# EAGLE board FLYTE-v2 - Copy (EAGLE 9.6.2)
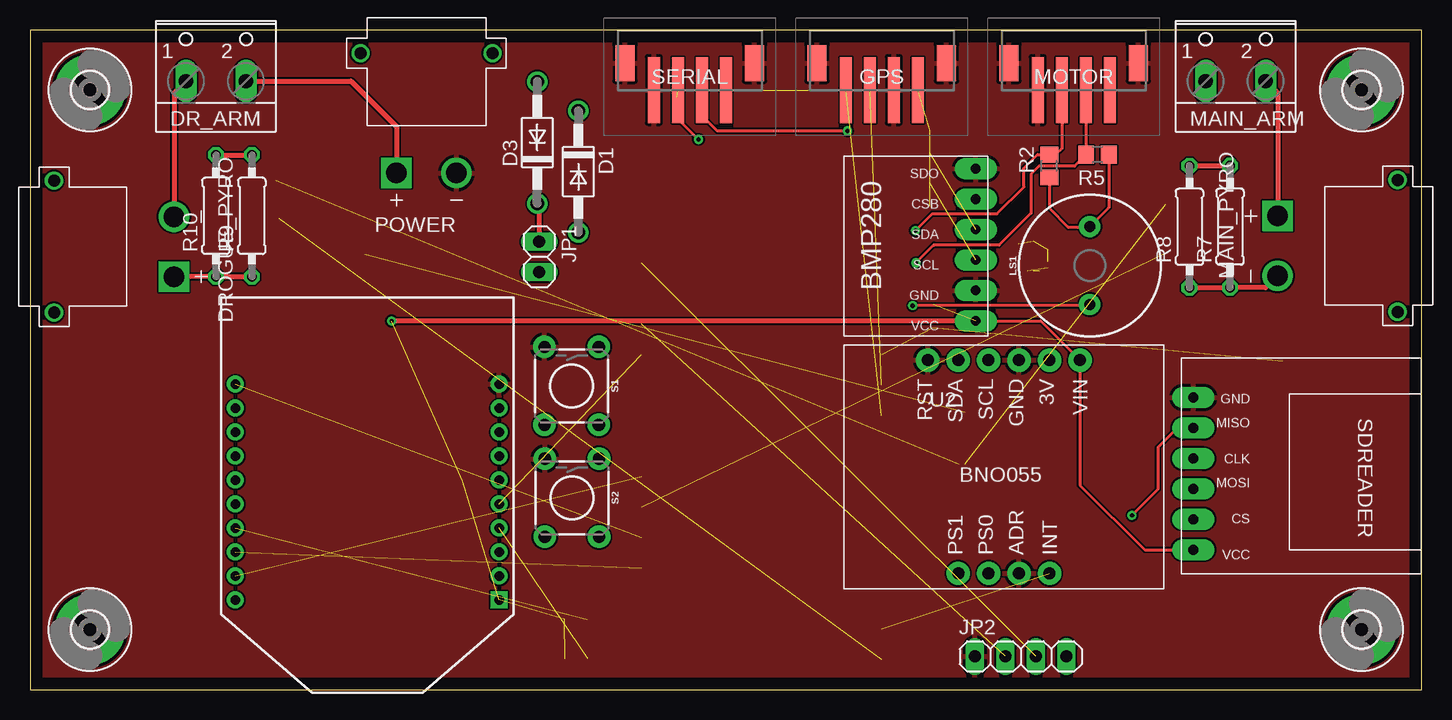
[diagram p0: board, top side]
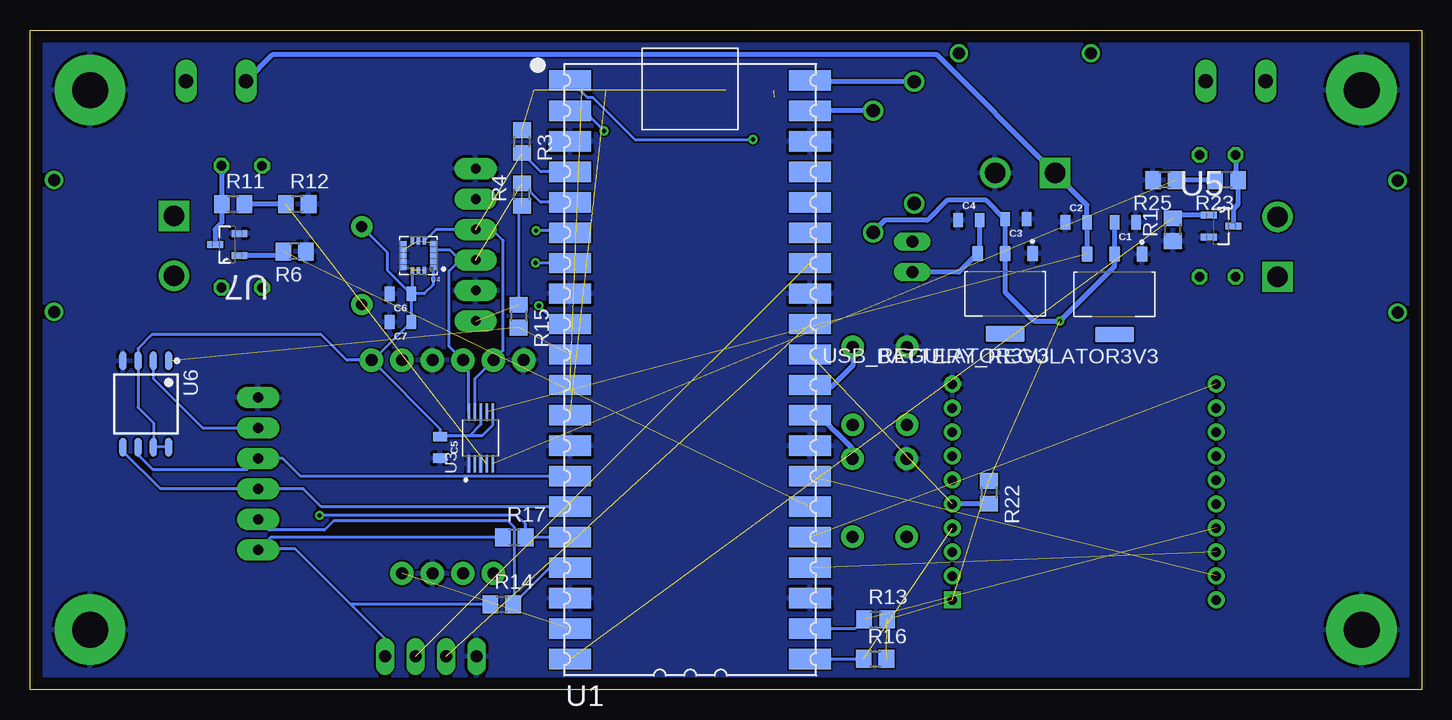
[diagram p1: board, bottom side, seen from below]

Size 116 x 55 mm. Coordinates in mm from the lower left corner, seen from the top.
Outline: 0,0 116,0 116,55 0,55 0,0
Copper layers (1*16): Top 0.035mm / dielectric 1.5mm / Bottom 0.035mm
Design rules "default": minimum track width 6mil, minimum drill 0.35mm, track to track 6mil, track to pad 6mil, pad to pad 6mil, via to via 6mil, smd to smd 6mil, copper to edge 40mil, drill to drill 6mil, minimum pad ring 10mil, minimum via ring 8mil, stop-mask expansion 4mil, vias tented up to drill 0mil, thermal gap 10mil

## Footprints (pad centres in the part's own frame; a part is rotated, then mirrored left to right if it is on the bottom)
SOT229P700X180-4N = smd 0.93 x 1.31: 1 -2.29,-3.345; 2 0,-3.345; 3 2.29,-3.345 | smd 3.24 x 1.31: 4 0,3.345
0805 = smd 0.8 x 1.2: 1 -0.9,0; 2 0.9,0
DO41-10 = drill 1.118: A 5.08,0; C -5.08,0
W237-102 = drill 1.194 long: 1 -2.5,-1.27; 2 2.5,-1.27
AMASS_XT30PW-M = drill 1.7: N 2.5,-10 | drill 1.7 square: P -2.5,-10 | drill 1: S1 5.5,0; S2 -5.5,0
4392 = smd 1 x 5.5: 1 3,3.5; 2 1,3.5; 3 -1,3.5; 4 -3,3.5 | smd 1.6 x 3: MP1 5.4,1.25; MP2 -5.4,1.25
3,0-PAD = drill 3 pad 5.842: B3,0 0,0
1X02 = drill 1.016 long: 1 -1.27,0; 2 1.27,0
1X04 = drill 1.016 long: 1 -3.81,0; 2 -1.27,0; 3 1.27,0; 4 3.81,0
BUZZER-12MM = drill 0.9 pad 1.778: + 3.25,0; - -3.25,0
R0805 = smd 1.3 x 1.5: 1 -0.95,0; 2 0.95,0
0207/10 = drill 0.813 octagon: 1 -5.08,0; 2 5.08,0
TACTILE_SWITCH_PTH_6.0MM = drill 1.016 pad 1.88: 1 -3.251,2.261; 2 3.251,2.261; 3 -3.251,-2.261; 4 3.251,-2.261
PICO-PKG-NO_DEBUG = smd 3.5 x 1.7: P$1 -8.73,25.4; P$2 -8.73,22.86; P$3 -8.73,20.32; P$4 -8.73,17.78; P$5 -8.73,15.24; P$6 -8.73,12.7; P$7 -8.73,10.16; P$8 -8.73,7.62; P$9 -8.73,5.08; P$10 -8.73,2.54; P$11 -8.73,0; P$12 -8.73,-2.54; P$13 -8.73,-5.08; P$14 -8.73,-7.62; P$15 -8.73,-10.16; P$16 -8.73,-12.7; P$17 -8.73,-15.24; P$18 -8.73,-17.78; P$19 -8.73,-20.32; P$20 -8.73,-22.86; P$21 11.27,-22.86; P$22 11.27,-20.32; P$23 11.27,-17.78; P$24 11.27,-15.24; P$25 11.27,-12.7; P$26 11.27,-10.16; P$27 11.27,-7.62; P$28 11.27,-5.08; P$29 11.27,-2.54; P$30 11.27,0; P$31 11.27,2.54; P$32 11.27,5.08; P$33 11.27,7.62; P$34 11.27,10.16; P$35 11.27,12.7; P$36 11.27,15.24; P$37 11.27,17.78; P$38 11.27,20.32; P$39 11.27,22.86; P$40 11.27,25.4
DIP2200W51P200L3294H279Q20P = drill 0.8 pad 1.4 square: 1 -11,8.75 | drill 0.8 pad 1.4: 2 -11,6.75; 3 -11,4.75; 4 -11,2.75; 5 -11,0.75; 6 -11,-1.25; 7 -11,-3.25; 8 -11,-5.25; 9 -11,-7.25; 10 -11,-9.25; 11 11,-9.25; 12 11,-7.25; 13 11,-5.25; 14 11,-3.25; 15 11,-1.25; 16 11,0.75; 17 11,2.75; 18 11,4.75; 19 11,6.75; 20 11,8.75
SOP50P490X110-10N = smd 1.47 x 0.28: 1 -2.15,1; 2 -2.15,0.5; 3 -2.15,0; 4 -2.15,-0.5; 5 -2.15,-1; 6 2.15,-1; 7 2.15,-0.5; 8 2.15,0; 9 2.15,0.5; 10 2.15,1
PQFN50P300X300X100-16N = smd 0.53 x 0.35: 1 -1.22,1; 2 -1.22,0.5; 3 -1.22,0; 4 -1.22,-0.5; 5 -1.22,-1; 9 1.22,-1; 10 1.22,-0.5; 11 1.22,0; 12 1.22,0.5; 13 1.22,1 | smd 0.35 x 0.53: 6 -0.5,-1.22; 7 0,-1.22; 8 0.5,-1.22; 14 0.5,1.22; 15 0,1.22; 16 -0.5,1.22
SOT91P240X120-3N = smd 1.321 x 0.559: 1 -1.016,0.914; 2 -1.016,-0.914; 3 1.016,0
SOIC127P790X216-8N = smd 1.6 x 0.6: 1 -3.6,1.905; 2 -3.6,0.635; 3 -3.6,-0.635; 4 -3.6,-1.905; 5 3.6,-1.905; 6 3.6,-0.635; 7 3.6,0.635; 8 3.6,1.905
BMP280 = drill 0.8 pad 1.778 long: CSB 11.43,1; GND 3.81,1; SCL 6.35,1; SDA 8.89,1; SDO 13.97,1; VCC 1.27,1
SDREADER = drill 0.8 pad 1.778 long: CLK 1,9.62; CS 1,4.54; GND 1,14.7; MISO 1,12.16; MOSI 1,7.08; VCC 1,2
BNO055 = drill 1 pad 1.93: 3V 9.525,1.27; ADR 12.065,19.05; GND 12.065,1.27; INT 9.525,19.05; PS0 14.605,19.05; PS1 17.145,19.05; RST 19.685,1.27; SCL 14.605,1.27; SDA 17.145,1.27; VIN 6.985,1.27

## Placement (x,y rotation side)
BATTERY_REGULATOR3V3  AMS1117-3.3  [SOT229P700X180-4N]  25.6,32.95 180 bottom
C1  22uF  [0805]  24.7,38.95 180 bottom
C2  22uF  [0805]  28.79,38.97 0 bottom
C3  22uF  [0805]  33.82,39.23 180 bottom
C4  22uF  [0805]  37.74,39.15 0 bottom
C5  0.1uF  [0805]  81.81,20.19 270 bottom
C6  10 uF  [0805]  85.12,33 180 bottom
C7  100 nF  [0805]  85.12,30.65 180 bottom
D1  1N4004  [DO41-10]  45.71,43.19 270 top
D3  1N4004  [DO41-10]  42.29,45.61 90 top
DR_ARM  [W237-102]  15.5,52 0 top
DROGUE_PYRO  XT30PW-M  [AMASS_XT30PW-M]  2,36.93 90 top
GPS  4392  [4392]  71,53.5 180 top
H1  MOUNT-PAD-ROUND3.0  [3,0-PAD]  5,5 0 top
H2  MOUNT-PAD-ROUND3.0  [3,0-PAD]  5,50 0 top
H3  MOUNT-PAD-ROUND3.0  [3,0-PAD]  111,5 0 top
H4  MOUNT-PAD-ROUND3.0  [3,0-PAD]  111,50 0 top
JP1  [1X02]  42.45,36.08 270 top
JP2  [1X04]  82.59,2.76 0 top
LS1  BUZZER-PTH  [BUZZER-12MM]  88.35,35.35 90 top
MAIN_ARM  [W237-102]  100.5,52 0 top
MAIN_PYRO  XT30PW-M  [AMASS_XT30PW-M]  114,37 270 top
MOTOR  4392  [4392]  87,53.5 180 top
POWER  XT30PW-M  [AMASS_XT30PW-M]  33.05,53.07 0 top
R1  4.7K  [R0805]  20.72,38.35 90 bottom
R2  4.7K ohm  [R0805]  84.96,43.65 90 top
R3  4.7K ohm  [R0805]  75,45.69 270 bottom
R4  4.7K ohm  [R0805]  75,41.27 90 bottom
R5  4.7K ohm  [R0805]  88.99,44.6 180 top
R6  4.7K  [R0805]  93.94,36.54 180 bottom
R7  10 ohm  [0207/10]  100.04,38.6 90 top
R8  10 ohm  [0207/10]  96.66,38.59 90 top
R9  10 ohm  [0207/10]  18.5,39.5 90 top
R10  10 ohm  [0207/10]  15.5,39.5 90 top
R11  100K ohm  [R0805]  99.06,40.5 0 bottom
R12  100K ohm  [R0805]  93.72,40.5 0 bottom
R13  4.7K ohm  [R0805]  45.5,5.84 0 bottom
R14  4.7K ohm  [R0805]  76.68,7.11 0 bottom
R15  4.7K ohm  [R0805]  75.28,31.14 270 bottom
R16  100K ohm  [R0805]  45.55,2.56 0 bottom
R17  100K ohm  [R0805]  75.63,12.71 0 bottom
R22  4.7K ohm  [R0805]  36.06,16.44 270 bottom
R23  100K ohm  [R0805]  16.25,42.5 180 bottom
R25  100K ohm  [R0805]  21.43,42.5 180 bottom
S1  MOMENTARY-SWITCH-SPST-PTH-6.0MM  [TACTILE_SWITCH_PTH_6.0MM]  45.15,25.32 270 top
S2  MOMENTARY-SWITCH-SPST-PTH-6.0MM  [TACTILE_SWITCH_PTH_6.0MM]  45.18,15.99 270 top
SERIAL  4392  [4392]  55,53.5 180 top
U1  [PICO-PKG-NO_DEBUG]  62.23,25.4 0 bottom
U2  XBP9B-XCST-021  [DIP2200W51P200L3294H279Q20P]  28.11,16.22 180 top
U3  ADS1115IDGSR  [SOP50P490X110-10N]  78.42,20.98 90 bottom
U4  H3LIS200DLTR  [PQFN50P300X300X100-16N]  83.63,36.17 180 bottom
U5  BS170F  [SOT91P240X120-3N]  16.71,38.65 0 bottom
U6  W25Q32JVSSIQ  [SOIC127P790X216-8N]  106.35,23.81 270 bottom
U7  BS170F  [SOT91P240X120-3N]  99.56,37.1 180 bottom
U$1  BMP280  [BMP280]  79.85,29.47 90 top
U$3  SDREADER  [SDREADER]  95.98,9.65 0 top
U$4  BNO055  [BNO055]  94.52,28.73 180 top
USB_REGULATOR3V3  AMS1117-3.3  [SOT229P700X180-4N]  34.72,33 180 bottom

## Library data of the parts
BATTERY_REGULATOR3V3 USB_REGULATOR3V3 = AMS1117-3.3; AVAILABILITY: Not in stock; DESCRIPTION: Sot223/Pkg 1-Amp 3.3-Volt Low Drop Out Voltage Regulatator; MF: Advanced Monolithic Systems; MP: AMS1117-3.3; PACKAGE: SOT-223 Seeed Technology; PRICE: None
C1-C7 = SparkFun-Capacitors; PROD_ID: CAP-08402
D1 D3 = diode
DR_ARM MAIN_ARM = con-wago-500; MPN: 237-102; OC_FARNELL: unknown; OC_NEWARK: 70K9898
DROGUE_PYRO MAIN_PYRO POWER = XT30PW-M; AVAILABILITY: Not in stock; CHECK_PRICES: https://www.snapeda.com/parts/XT30PW-M/AMASS/view-part/?ref=eda; DESCRIPTION: Socket; DC supply; XT30; male; PIN: 2; on PCBs; THT; Colour: yellow; MF: AMASS; MP: XT30PW-M; PACKAGE: None; PRICE: None; SNAPEDA_LINK: https://www.snapeda.com/parts/XT30PW-M/AMASS/view-part/?ref=snap
GPS MOTOR SERIAL = 4392; DESCRIPTION: Adafruit Accessories JST PH 4-pin Horizontal Connector (10-pack) - STEMMA; HEIGHT: 6.85mm; MANUFACTURER_NAME: Adafruit; MANUFACTURER_PART_NUMBER: 4392; MOUSER_PART_NUMBER: 485-4392; MOUSER_PRICE-STOCK: https://www.mouser.co.uk/ProductDetail/Adafruit/4392?qs=xZ%2FP%252Ba9zWqbG2TKb%252Bnxciw%3D%3D
H1-H4 = holes
JP1 JP2 = pinhead
LS1 = SparkFun-Electromechanical; PROD_ID: COMP-08253; SF_SKU: COM-07950
R1-R17 R22 R23 R25 = rcl; SPICEPREFIX: R
S1 S2 = SparkFun-Switches; PROD_ID: SWCH-08441; SF_SKU: COM-00097
U1 = RpiPico
U2 = XBP9B-XCST-021; AVAILABILITY: In Stock; CHECK_PRICES: https://www.snapeda.com/parts/XBP9B-XCST-021/Digi+International/view-part/?ref=eda; DESCRIPTION: General ISM < 1GHz - Transceiver Module 920MHz Antenna Not Included, RP-SMA Through Hole; MF: Digi International; MP: XBP9B-XCST-021; PACKAGE: Module Digi International; PRICE: None; PURCHASE-URL: https://www.snapeda.com/api/url_track_click_mouser/?unipart_id=521579&manufacturer=Digi International&part_name=XBP9B-XCST-021&search_term=None; SNAPEDA_LINK: https://www.snapeda.com/parts/XBP9B-XCST-021/Digi+International/view-part/?ref=snap
U3 = ADS1115IDGSR; AVAILABILITY: In Stock; CHECK_PRICES: https://www.snapeda.com/parts/ADS1115IDGSR/Texas+Instruments/view-part/?ref=eda; DESCRIPTION: 16-bit, 860-SPS, 4-channel, delta-sigma ADC with PGA, oscillator, VREF, comparator and I2C; MF: Texas Instruments; MP: ADS1115IDGSR; PACKAGE: VSSOP-10 Texas Instruments; PRICE: None; PURCHASE-URL: https://www.snapeda.com/api/url_track_click_mouser/?unipart_id=45903&manufacturer=Texas Instruments&part_name=ADS1115IDGSR&search_term=ads1115; SNAPEDA_LINK: https://www.snapeda.com/parts/ADS1115IDGSR/Texas+Instruments/view-part/?ref=snap
U4 = H3LIS200DLTR; AVAILABILITY: In Stock; CHECK_PRICES: https://www.snapeda.com/parts/H3LIS200DLTR/STMicroelectronics/view-part/?ref=eda; DESCRIPTION: Accelerometer X, Y, Z Axis ±100g, ±200g 25Hz ~ 500Hz 16-TFLGA (3x3); MF: STMicroelectronics; MP: H3LIS200DLTR; PACKAGE: TFLGA-16 STMicroelectronics; PRICE: None; PURCHASE-URL: https://www.snapeda.com/api/url_track_click_mouser/?unipart_id=523021&manufacturer=STMicroelectronics&part_name=H3LIS200DLTR&search_term=h3lis200dltr; SNAPEDA_LINK: https://www.snapeda.com/parts/H3LIS200DLTR/STMicroelectronics/view-part/?ref=snap
U5 U7 = BS170F; AVAILABILITY: In Stock; CHECK_PRICES: https://www.snapeda.com/parts/BS170F/Diodes+Inc./view-part/?ref=eda; DESCRIPTION: N-Channel 60 V 150µA (Ta) 330mW (Ta) Surface Mount SOT-23-3; MF: Diodes Inc.; MP: BS170F; PACKAGE: SOT-23 Multicomp; PRICE: None; SNAPEDA_LINK: https://www.snapeda.com/parts/BS170F/Diodes+Inc./view-part/?ref=snap
U6 = W25Q32JVSSIQ; AVAILABILITY: In Stock; DESCRIPTION: FLASH - NOR Memory IC 32Mb (4M x 8) SPI - Quad I/O 133 MHz 8-SOIC; MF: Winbond; MP: W25Q32JVSSIQ; PACKAGE: SOIC-8 Winbond; PRICE: None; PURCHASE-URL: https://pricing.snapeda.com/search/part/W25Q32JVSSIQ/?ref=eda
U$1 = BMP280
U$3 = SDREADER
U$4 = BNO055

## Nets
3V3: BATTERY_REGULATOR3V3.2 C1.2 C3.2 C5.1 C6.1 C7.1 D1.A GPS.4 JP2.4 LS1.+ R2.1 R3.1 R4.1 R5.1 R13.2 R14.1 R15.1 R16.2 R17.1 R22.1 SERIAL.4 U2.1 U3.6 U3.8 U4.1 U4.14 U4.15 U6.3 U6.7 U6.8 U$1.VCC U$3.VCC U$4.VIN USB_REGULATOR3V3.2
3V3(OUT): U1.P$36
AIR_DATA: JP2.3 U1.P$34
AIR_SCK: JP2.2 U1.P$32
ATTN: U1.P$27 U2.19
BNO_INT: U1.P$19 U$4.INT
BUZZER: LS1.- U1.P$9
CS_FLASH: R15.2 U1.P$10 U6.1
CS_SD: R14.2 U1.P$17 U$3.CS
CS_SX: R13.1 U1.P$22 U2.17
DROGUE: R1.2 U1.P$20 U5.1
GND: BATTERY_REGULATOR3V3.1 C1.1 C2.1 C3.1 C4.1 C5.2 C6.2 C7.2 GPS.3 GPS.MP1 GPS.MP2 H1.B3,0 H2.B3,0 H3.B3,0 H4.B3,0 JP2.1 MOTOR.1 MOTOR.MP1 MOTOR.MP2 POWER.N R1.1 R6.1 R12.2 R25.2 S1.3 S2.3 SERIAL.1 SERIAL.MP1 SERIAL.MP2 U1.P$3 U1.P$8 U1.P$13 U1.P$18 U1.P$23 U1.P$28 U1.P$33 U1.P$38 U2.10 U3.1 U3.3 U4.5 U4.7 U4.10 U4.12 U4.13 U4.16 U5.2 U6.4 U7.2 U$1.GND U$1.SDO U$3.GND U$4.ADR U$4.GND U$4.RST USB_REGULATOR3V3.1
MAIN: R6.2 U1.P$26 U7.1
MISO0: R16.1 U1.P$21 U2.4
MISO1: R17.2 U1.P$16 U6.2 U$3.MISO
MOSI0: U1.P$25 U2.11
MOSI1: U1.P$15 U6.5 U$3.MOSI
N$1: D1.C U1.P$39
N$2: DR_ARM.1 DROGUE_PYRO.N
N$3: S2.1 U1.P$29
N$4: MAIN_PYRO.N R7.1 R8.1
N$5: R7.2 R8.2 R11.1 U7.3
N$6: MAIN_ARM.2 MAIN_PYRO.P
N$7: DROGUE_PYRO.P R9.1 R10.1
N$8: S1.1 U1.P$30
N$12: R9.2 R10.2 R23.1 U5.3
N$17: D3.A U1.P$40
RX: GPS.1 U1.P$12
SCK0: U1.P$24 U2.18
SCK1: U1.P$14 U6.6 U$3.CLK
SCL0: MOTOR.3 R5.2 U1.P$7
SCL1: R4.2 U1.P$5 U3.10 U4.4 U$1.SCL U$4.SCL
SDA0: MOTOR.2 R2.2 U1.P$6
SDA1: R3.2 U1.P$4 U3.9 U4.6 U$1.SDA U$4.SDA
SENSE_DROG: R23.2 R25.1 U3.5
SENSE_MAIN: R11.2 R12.1 U3.4
SER_RX: SERIAL.3 U1.P$2
SER_TX: SERIAL.2 U1.P$1
SX_RESET: R22.2 U1.P$31 U2.5
TX: GPS.2 U1.P$11
VBUS: D3.C JP1.1
VBUS_REG: C4.2 JP1.2 USB_REGULATOR3V3.3
VCC: BATTERY_REGULATOR3V3.3 C2.2 DR_ARM.2 MAIN_ARM.1 POWER.P U3.7

## Tracks (layer width: path | path; a pad name or v marks a point on that pad's centre or on a via)
3V3  (via drill 0.35)  (9 unrouted)
  Top 0.254: U$1.VCC 84.25,30.74 U$4.VIN 87.53,17.04 92.92,11.65 U$3.VCC | R2.1 84.96,40.16 86.54,38.58 88.33,38.58 LS1.+ 89.94,40.19 R5.1
  Top 0.406: U$1.VCC v30.16,30.74 v30.15,30.73
  Bottom 0.254: 79.35,21.16 78.3,21.16 77.42,22.04 U3.6 | 79.35,21.16 81.74,21.16 C5.1 81.81,21.74 U$4.VIN | U6.8 U6.7 105.69,20.24 105.69,22.23 106.98,23.52 U6.3 106.98,28.45 105.84,29.59 91.72,29.59 89.59,27.46 U$4.VIN | 83.94,32.72 84.13,32.91 | 84.13,32.91 C6.1 | C6.1 84.2,33.02 83.14,33.02 82.41,33.75 U4.1 | U4.14 84.13,32.91 | C6.1 C7.1 87.41,27.46 U$4.VIN | U3.8 78.42,22.09 79.35,21.16 | R4.1 75.28,40.04 R15.1 | C6.1 86.21,34.99 86.21,36.47 LS1.+ | R17.1 95.92,12.71 U$3.VCC 96.92,11.71 93.88,11.71 89.28,7.11 | R14.1 89.28,7.11 | JP2.4 86.4,4.23 89.28,7.11
  Bottom 0.406: C1.2 BATTERY_REGULATOR3V3.2 25.6,35.28 v30.15,30.73 32.31,30.73 34.72,33.15 USB_REGULATOR3V3.2 C3.2 36.28,40.79 39.55,40.79 41.2,39.14 44.73,39.14 45.71,38.16 D1.A
AIR_DATA  (1 unrouted)
AIR_SCK  (1 unrouted)
ATTN  (1 unrouted)
BNO_INT  (1 unrouted)
BUZZER  (via drill 0.35)
  Top 0.254: LS1.- 88.25,32 v73.58,32
  Bottom 0.254: v73.58,32 72.06,30.48 U1.P$9
CS_FLASH  (2 unrouted)
CS_SD
  Bottom 0.254: U1.P$17 72.67,10.16 R14.2 75.61,7.22 75.61,13.53 76.13,14.05 90.7,14.05 91.44,13.31 96.1,13.31 U$3.CS
CS_SX  (1 unrouted)
  Bottom 0.254: R13.1 47.21,5.08 U1.P$22
DROGUE  (1 unrouted)
  Bottom 0.406: U5.1 20.46,39.56 R1.2
GND  (4 unrouted)
  pour Bottom: -9.5,59 -9.5,-4.5 -4.25,-9.75 119.25,-9.75 127,-2 127,49.5 105.5,71 2.5,71
  pour Top: -30.5,47.5 -30.5,8.5 -8.75,-13.25 125.25,-13.25 137,-1.5 137,62.5 129,70.5 -7.5,70.5
MAIN  (1 unrouted)
  Bottom 0.152: U1.P$26 50.96,15.22 50.55,14.81
  Bottom 0.406: R6.2 95.24,36.19 U7.1
MISO0  (1 unrouted)
  Bottom 0.254: R16.1 46.52,2.54 U1.P$21
MISO1  (via drill 0.35)
  Top 0.254: U$3.MISO 95.65,21.81 94.03,20.19 94.03,16.69 v91.87,14.53
  Bottom 0.254: U6.2 105.71,25.93 101.59,21.81 U$3.MISO | U1.P$16 74.56,12.7 R17.2 74.68,13.8 75.47,14.58 91.82,14.58 v91.87,14.53
MOSI0  (1 unrouted)
MOSI1
  Bottom 0.254: U6.5 108.25,19.86 105.12,16.73 97.36,16.73 U$3.MOSI 93.21,16.73 91.72,15.24 U1.P$15
N$1
  Bottom 0.406: D1.C U1.P$39
N$2
  Top 0.406: DR_ARM.1 12,49.73 DROGUE_PYRO.N
N$3
  Bottom 0.406: S2.1 47.44,20.08 50.22,22.86 U1.P$29
N$4
  Top 0.406: MAIN_PYRO.N 103.02,33.52 100.26,33.52 | 100.26,33.52 R7.1 | R8.1 100.25,33.51 100.26,33.52
N$5
  Top 0.406: R8.2 R7.2
  Bottom 0.406: U7.3 100.58,38.34 100.01,38.91 R11.1 100.04,40.53 R7.2
N$6
  Top 0.406: MAIN_ARM.2 104,49.73 MAIN_PYRO.P
N$7
  Top 0.406: DROGUE_PYRO.P R10.1 R9.1
N$8
  Bottom 0.406: S1.1 47.41,27.01 49.17,25.25 50.81,25.25 U1.P$30
N$12
  Top 0.406: R10.2 R9.2
  Bottom 0.406: R10.2 15.5,42.7 R23.1 15.3,40.44 15.69,40.05 U5.3
N$17
  Bottom 0.406: D3.A 50.85,50.69 U1.P$40
RX  (1 unrouted)
SCK0  (1 unrouted)
SCK1
  Bottom 0.254: U6.6 106.98,19.58 105.77,18.36 97.89,18.36 U$3.CLK 94.94,19.27 93.45,17.78 U1.P$14
SCL0  (via drill 0.35)
  Top 0.254: v73.86,35.59 75.36,37.08 75.39,37.06 80.77,37.06 83.44,39.73 83.44,42.98 84.1,43.63 87.07,43.63 R5.2 | 88.06,44.57 R5.2 | MOTOR.3 88,44.63 R5.2
  Bottom 0.254: U1.P$7 73.84,35.56 v73.86,35.59
SCL1  (1 unrouted)
  Bottom 0.254: U1.P$5 73.42,40.64 R4.2 | 80.16,35.82 81.08,34.9 81.08,28.62 U$4.SCL 79.42,26.97 U3.10 | 80.16,35.82 U$1.SCL | U4.4 81.01,36.67 80.16,35.82
SDA0  (via drill 0.35)
  Top 0.254: v73.81,38.28 75.21,39.67 80.62,39.67 82.86,41.91 82.86,43.46 84,44.6 R2.2 85.5,44.6 86,45.11 MOTOR.2
  Bottom 0.254: U1.P$6 71.14,38.28 v73.81,38.28
SDA1  (1 unrouted)
  Bottom 0.254: U1.P$4 73.44,43.18 R3.2 | U4.6 82.16,38.36 U$1.SDA 77.48,38.36 76.56,37.44 76.56,28.28 U$4.SDA 78.92,25.91 U3.9
SENSE_DROG  (1 unrouted)
  Bottom 0.406: R23.2 R25.1
SENSE_MAIN  (1 unrouted)
  Bottom 0.406: R12.1 R11.2
SER_RX  (via drill 0.35)
  Top 0.254: SERIAL.3 56,47.86 57.28,46.58 v68.15,46.58
  Bottom 0.254: v68.15,46.58 69.83,48.26 U1.P$2
SER_TX  (via drill 0.35)  (1 unrouted)
  Top 0.254: v55.73,45.87 53.95,47.65 53.95,49.38
  Bottom 0.254: U1.P$1 69.55,49.39 69.09,49.39 65.58,45.87 v55.73,45.87
SX_RESET  (1 unrouted)
  Bottom 0.406: R22.2 39.09,15.49 U2.5
TX  (1 unrouted)
VBUS
  Top 0.406: D3.C 42.45,40.37 JP1.1
VBUS_REG
  Bottom 0.406: C4.2 36.84,36.52 USB_REGULATOR3V3.3 38.55,34.81 JP1.2
VCC  (1 unrouted)
  Top 0.406: DR_ARM.2 26.77,50.73 30.55,46.95 POWER.P
  Bottom 0.406: MAIN_ARM.1 95.77,52.96 40.44,52.96 POWER.P 27.89,40.41 C2.2 BATTERY_REGULATOR3V3.3